# EAGLE board led (EAGLE 6.5.0)
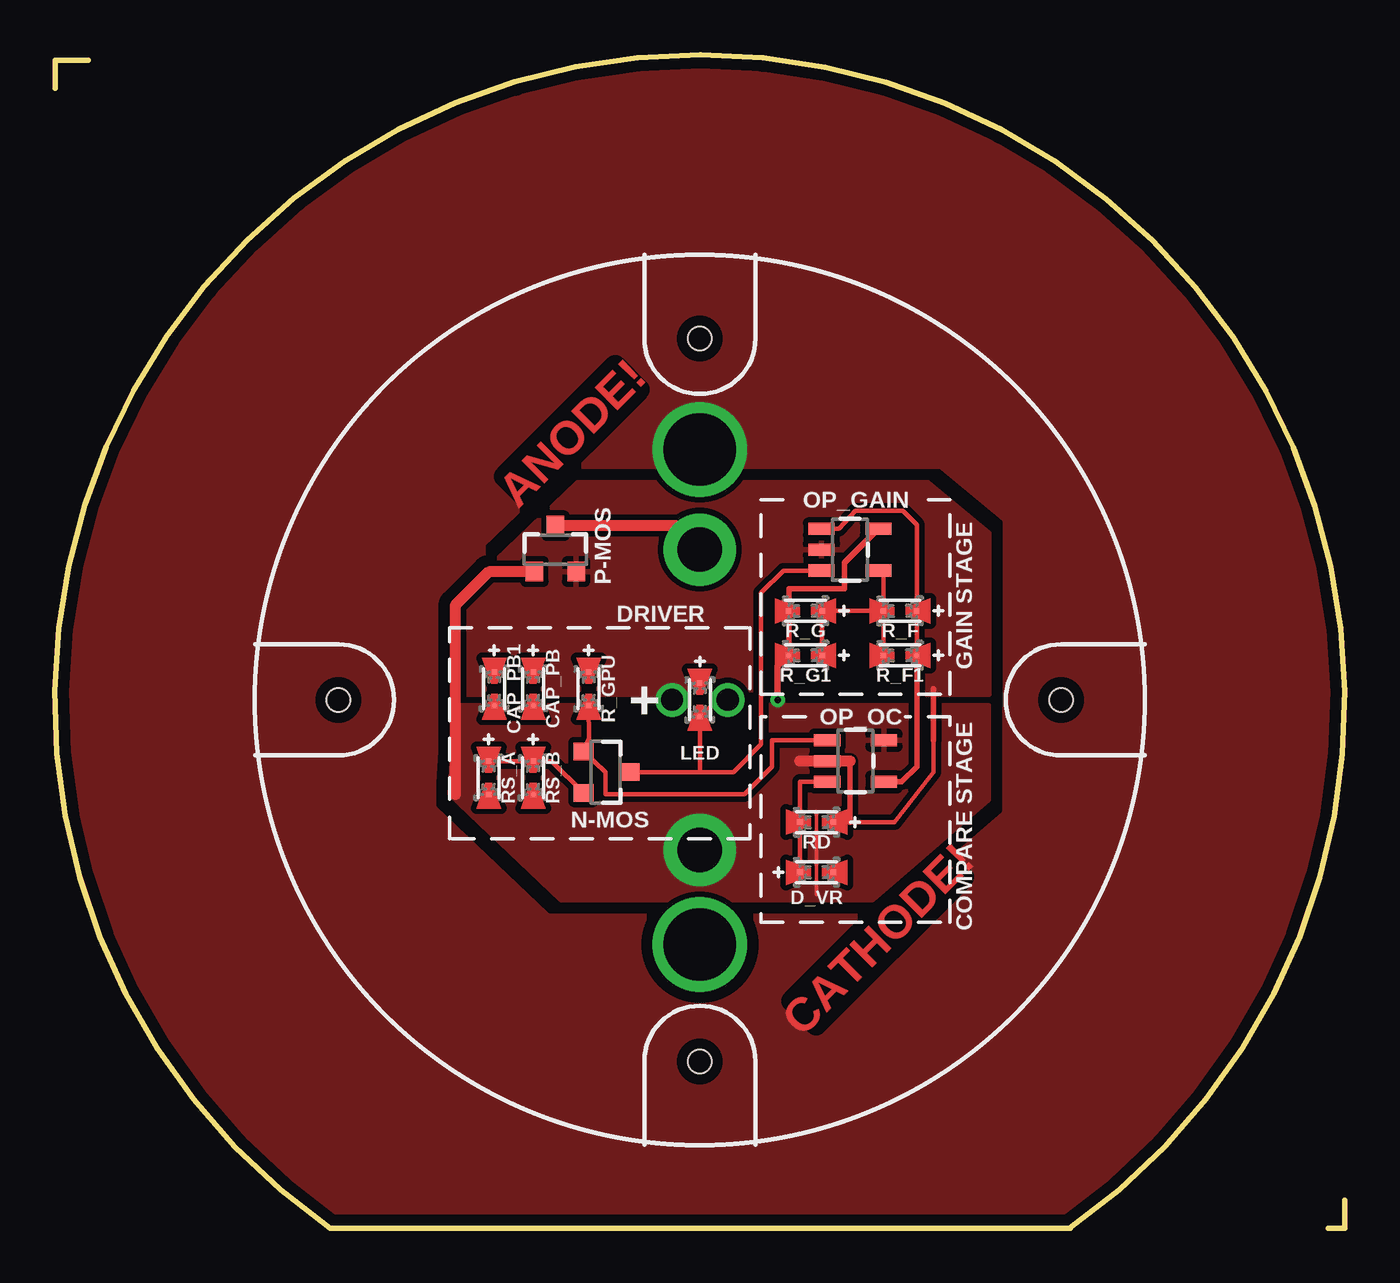
[diagram p0: board, top side]
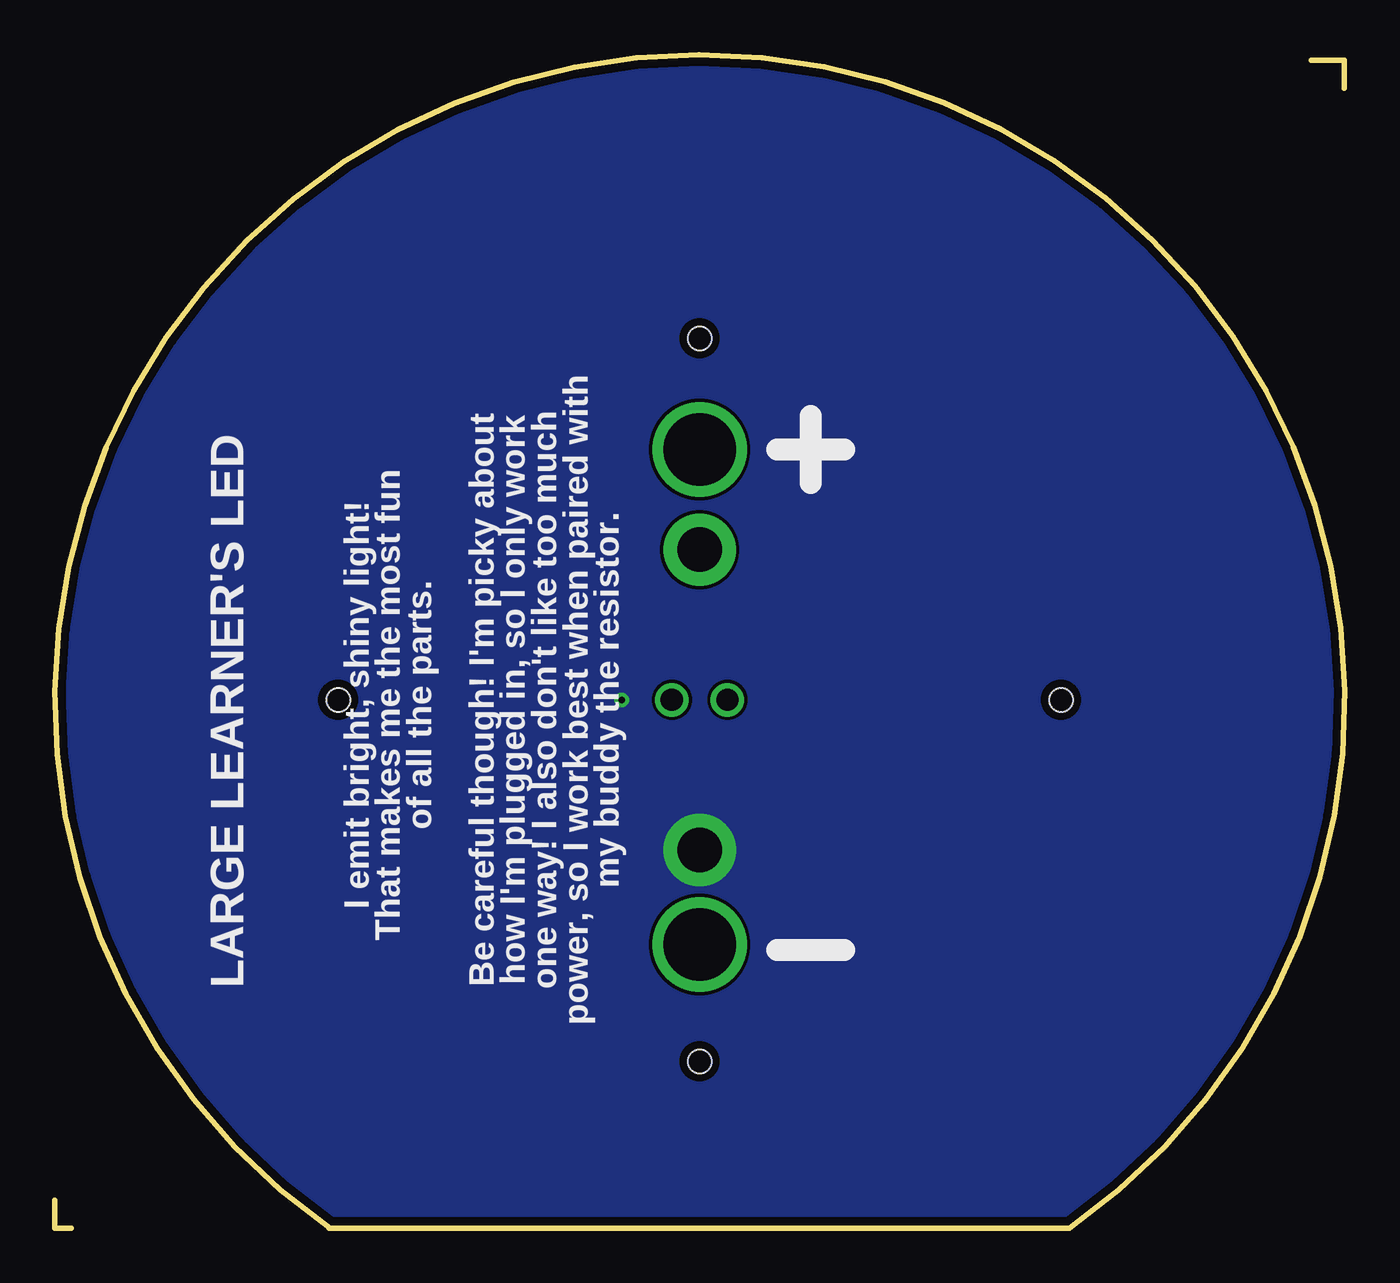
[diagram p1: board, bottom side, seen from below]

Size 58.94 x 53.59 mm. Coordinates in mm from the lower left corner, seen from the top.
Outline: 1.54,53.34 0.01,53.34 0.01,52.07
Outline: 46.37,0 12.59,0 arc-145 29.5,53.59 arc-145 46.37,0
Outline: 46.37,0 46.39,0
Outline: 58.94,1.27 58.94,0 58.18,0
Copper layers (1*16): Top 0.0356mm / dielectric 1.5011mm / Bottom 0.0356mm
Design rules "LaenPCBOrder *": minimum track width 6mil, minimum drill 13mil, track to track 6mil, track to pad 6mil, pad to pad 6mil, via to via 6mil, smd to smd 6mil, copper to edge 15mil, drill to drill 6mil, minimum pad ring 7mil, minimum via ring 7mil, stop-mask expansion 4mil, vias tented up to drill 20mil, thermal gap 10mil
Holes 1.07 mm at 29.48,7.62 45.99,24.13 12.97,24.13 29.48,40.64

## Footprints (pad centres in the part's own frame; a part is rotated, then mirrored left to right if it is on the bottom)
0402-0603-0805-UNIVERSAL = smd 0.254 x 0.254: + -0.762,0; - 0.762,0
SOT23-3 = smd 0.8 x 0.9: 1 -0.95,-1; 2 0.95,-1; 3 0,1.1
SOT23-5 = smd 0.55 x 1.2: 1 -0.95,-1.3; 2 0,-1.3; 3 0.95,-1.3; 4 0.95,1.3; 5 -0.95,1.3

## Placement (x,y rotation side)
CAP_PB  0.1uf  [0402-0603-0805-UNIVERSAL]  21.86,24.64 270 top
CAP_PB1  0.1uf  [0402-0603-0805-UNIVERSAL]  20.08,24.64 270 top
D_VR  [0402-0603-0805-UNIVERSAL]  34.81,16.26 0 top
LED  [0402-0603-0805-UNIVERSAL]  29.48,24.13 270 top
N-MOS  MOSFET-NCHANNELSMD  [SOT23-3]  25.16,20.83 270 top
OP_GAIN  [SOT23-5]  36.33,30.99 270 top
OP_OC  OPA344  [SOT23-5]  36.59,21.34 270 top
P-MOS  [SOT23-3]  22.87,30.99 0 top
R_F  9-10k  [0402-0603-0805-UNIVERSAL]  38.62,28.19 180 top
R_F1  [0402-0603-0805-UNIVERSAL]  38.62,26.16 180 top
R_G  1kohm  [0402-0603-0805-UNIVERSAL]  34.3,28.19 180 top
R_G1  [0402-0603-0805-UNIVERSAL]  34.3,26.16 180 top
R_GPU  10k  [0402-0603-0805-UNIVERSAL]  24.4,24.64 270 top
RD  10k  [0402-0603-0805-UNIVERSAL]  34.81,18.54 180 top
RS_A  1ohm  [0402-0603-0805-UNIVERSAL]  19.82,20.57 270 top
RS_B  NONE  [0402-0603-0805-UNIVERSAL]  21.86,20.57 270 top

## Library data of the parts
CAP_PB CAP_PB1 D_VR LED N-MOS R_F R_F1 R_G R_G1 R_GPU RD RS_A RS_B = tekdemo
OP_GAIN OP_OC = SparkFun-AnalogIC
P-MOS = tekdemo; PROD_ID: TRANS-08285

## Nets
GATE: N-MOS.1 OP_OC.1 R_GPU.-
GND: CAP_PB1.- CAP_PB.- D_VR.- OP_GAIN.5 OP_OC.5 P-MOS.1 R_G1.- R_G.- RS_A.- RS_B.-
N$2: N-MOS.2 RS_A.+ RS_B.+
V_AMP: OP_GAIN.1 OP_OC.4 R_F1.+ R_F.+
VCC: CAP_PB1.+ CAP_PB.+ LED.+ OP_GAIN.2 OP_OC.2 P-MOS.2 R_GPU.+ RD.+
VDIV: OP_GAIN.4 R_F1.- R_F.- R_G1.+ R_G.+
VIN: P-MOS.3
VREF: D_VR.+ OP_OC.3 RD.-
VSENSE: LED.- N-MOS.3 OP_GAIN.3

## Tracks (layer width: path | path; a pad name or v marks a point on that pad's centre or on a via)
GATE
  Top 0.203: OP_OC.1 32.78,22.29 32.78,21.08 31.51,19.81 25.16,19.81 25.16,20.83 25.17,20.83 N-MOS.1 24.41,22.35 R_GPU.-
GND  (via drill 0.3, 2.03 pad 3.3)
  Top 0.152: 34.81,19.05 34.81,15.24
  Top 0.254: OP_GAIN.5 36.08,30.38 36.08,29.21 33.54,29.21 R_G.- R_G1.- 33.03,25.65
  Top 0.305: v33.03,24.13 33.03,25.65
  Top 0.508: P-MOS.1 21.65,29.97 19.82,29.97 18.3,28.45 18.3,19.81 | 36.33,21.34 34.05,21.34
  other vias: 29.48,17.27
  pour Top (isolate 0.254): 23.13,14.99 18.05,19.81 18.3,23.88 42.68,23.88 42.68,19.56 37.35,14.99
  pour Bottom: -1,24.13 -1,-0.63 -0.37,-1.27 62.5,-1.27 62.5,55.88 9.16,55.88 -1,55.88
N$2
  Top 0.203: N-MOS.2 22.7,21.34 RS_B.+ RS_A.+
N$4  (via drill 3.3)
  other vias: 29.48,12.95
N$5  (via drill 3.3)
  other vias: 29.48,35.56
  pour Top (isolate 0.508, rank 6): -3.04,54.36 63.26,54.36 63.26,-1.78 -3.04,-1.78
V_AMP
  Top 0.203: OP_GAIN.1 35.83,31.94 36.59,32.77 38.75,32.77 39.38,32.13 R_F.+ R_F1.+
  Top 0.254: OP_OC.4 38.69,20.39 39.38,21.08 R_F1.+
VCC  (via drill 1.02)
  Top 0.203: RD.+ 36.33,18.54 38.37,18.54 40.14,20.83 40.14,22.29
  Top 0.254: 40.14,22.29 40.14,24.64 | OP_OC.2 36.33,21.34 36.33,18.54
  other vias: 28.21,24.13
  pour Top (isolate 0.254): 18.3,24.38 42.68,24.38 42.68,31.75 39.89,34.04 23.89,34.04 18.05,28.45
VDIV
  Top 0.203: R_F.- R_G.+ R_G1.+ | R_F1.- R_F.- | OP_GAIN.4 37.86,30.04 R_F.-
VIN  (via drill 2.03 pad 3.3)
  Top 0.508: v29.48,30.99 28.38,32.09 P-MOS.3
VREF
  Top 0.203: D_VR.+ RD.- 34.05,20.39 OP_OC.3
VSENSE  (via drill 1.02)
  Top 0.152: LED.- 30.24,24.13 v30.75,24.13
  Top 0.203: OP_GAIN.3 33.29,30.04 32.27,29.02 32.27,22.1 31,20.83 29.48,20.83 | 29.48,20.83 N-MOS.3 | LED.- 29.48,20.83

## Text on the board
Top: ANODE! | CATHODE!
tPlace: GAIN STAGE | DRIVER | + | COMPARE STAGE
bPlace: I emit bright, shiny light! / That makes me the most fun / of all the parts. / / Be careful though! I'm picky about / how I'm plugged in, so I only work / one way! I also don't like too much / power, so I work best when paired with / my buddy the resistor. | LARGE LEARNER'S LED
tStop: ANODE! | CATHODE!